# Altium PCB CT310高端控制盒核心板电路V1.3.PcbDoc (part 2 of 10)
Units mil, origin at the board's own origin, x right, y up, seen from the top; angles counter-clockwise.
Board outline 3735.76 x 4625 mil, 2 copper layers (TOP, BOTTOM), stack 10.4 mil thick; 198 components, 362 nets, 1085 pads, 352 vias.
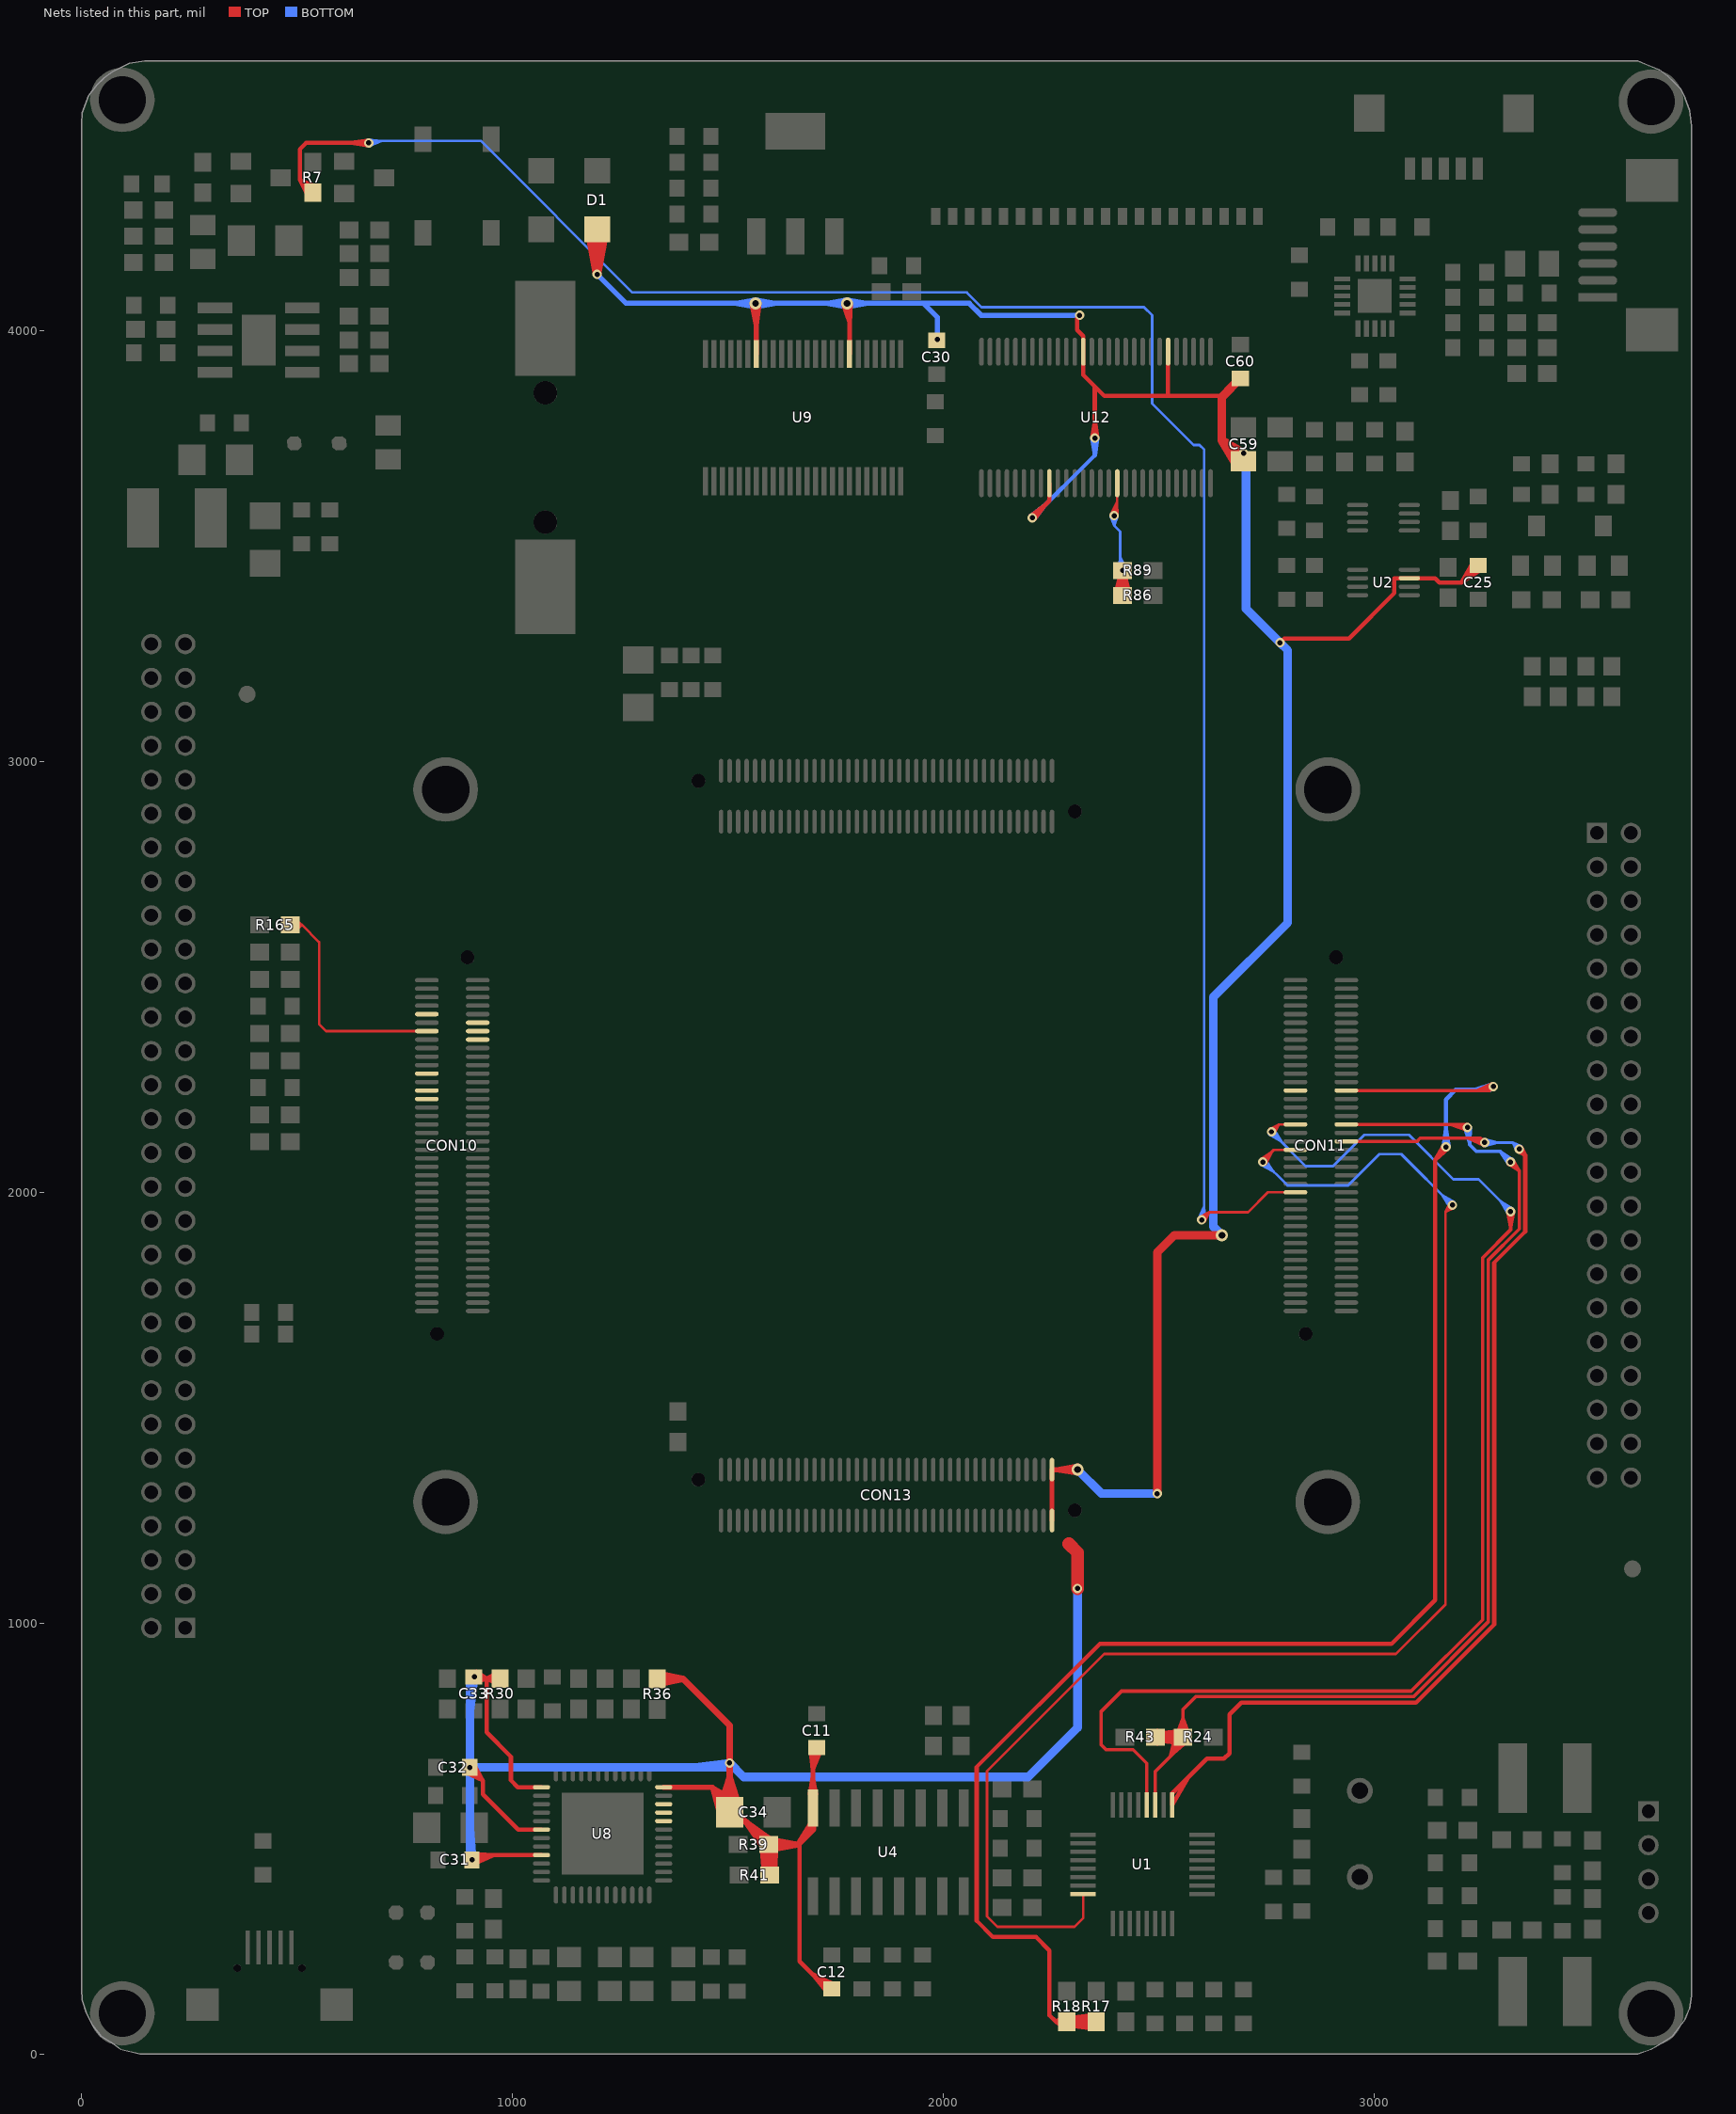
[diagram p2: the nets of this part, all layers, seen from the top]

## Via types
v1: diameter 22, hole 12, TOP to BOTTOM, tented both sides, 177 vias
v2: diameter 22, hole 12, TOP to BOTTOM, 89 vias
v3: diameter 28, hole 16, TOP to BOTTOM, 37 vias
v4: diameter 30, hole 20, TOP to BOTTOM, tented both sides, 26 vias
v5: diameter 24, hole 12, TOP to BOTTOM, 17 vias
v6: diameter 50, hole 30, TOP to BOTTOM, tented both sides, 5 vias
v7: diameter 40, hole 24, TOP to BOTTOM, 1 vias

## Nets (pads, with @x,y where several pads share a name; then routed paths per layer and width w, separated by ;. In a path a pad name is that pad's centre, name@x,y a point inside that pad or via, vN(x,y) a via of type N, cw(c..) or ccw(c..) an arc to the next point about the centre after c; other vN are vias at no path point) (continued)
CAM_D6: CON11.36 U1.12 | length 3365.9
  TOP w6: v2@2756.12,2146.51 2777.86,2157.1 ; v2(2760.76,2140) 2777.86,2157.1 ; v2@2767.27,2135.36 2777.86,2157.1 ; CON11.36@2793.9,2157.1 2777.86,2157.1 ; CON11.36@2816.4,2157.1 2777.86,2157.1
  TOP w8: U1.12@2471.41,577.79 2471.41,674.35 2439.76,706 2376.76,706 2365.76,717 2365.76,795 2412.76,842 3085.08,842 3250.65,1007.57 3250.65,1847.57 3315.76,1912.68 v1(3315.76,1955) 3315.76,1920 ; U1.12@2471.41,602.4 2471.41,631.32 ; v1@3308.8,1954.3 3315.76,1920 ; v1@3322.72,1954.3 3315.76,1920
  BOTTOM w6: v2@2755.82,2133.71 2784.49,2116.27 v2@2767.05,2144.94 ; v2(2760.76,2140) 2840.19,2060.57 2903.61,2060.57 2976.04,2133 3079.78,2133 3182.78,2030 3241.32,2030 3315.76,1955.56 v1(3315.76,1955) 3292.35,1978.97 ; v1@3309.41,1950.13 3292.35,1978.97 ; v1@3320.77,1961.23 3292.35,1978.97
CAM_D7: CON11.35 R24.1 R43.1 U1.11 | length 5095.2
  TOP w6: v1@3208.66,2157.1 v1(3215.76,2150)
  TOP w8: U1.11@2491.09,577.79 2491.09,655.33 R24.1@2553,717.24 ; U1.11@2491.09,602.4 2491.09,631.32 ; R43.1@2491.19,735 R24.1@2555.33,735 ; R43.1@2493.16,735 R24.1@2536.85,735 ; R43.1@2493.84,727.34 R24.1@2536.85,735 ; R43.1@2493.84,742.66 R24.1@2536.85,735 ; R43.1@2495.98,719.57 R24.1@2536.85,735 ; R43.1@2495.98,750.43 R24.1@2536.85,735 ; R24.1@2538.88,741.03 2526.36,690.6 ; R24.1@2539.9,737.82 2555.33,778.69 ; R24.1@2546.51,738.5 2526.36,690.6 ; R24.1@2547.18,720.58 R43.1@2508.35,745.76 ; R24.1@2547.18,749.42 R43.1@2508.35,724.24 ; R24.1@2547.67,735.68 2555.33,778.69 ; R24.1@2548.9,719.96 R43.1@2509.12,739.94 ; R24.1@2548.9,750.04 R43.1@2509.12,730.06 ; R24.1@2550.96,727.7 R43.1@2508.35,745.76 ; R24.1@2550.96,742.3 R43.1@2508.35,724.24 ; R24.1@2551.85,727.46 R43.1@2509.12,739.94 ; R24.1@2551.85,742.54 R43.1@2509.12,730.06 ; R24.1@2552.32,719.35 R43.1@2509.12,730.06 ; R24.1@2552.32,750.65 R43.1@2509.12,739.94 ; R24.1@2553,717.68 R24.1@2553,717.24 ; R24.1@2553.55,727.32 R43.1@2509.12,730.06 ; R24.1@2553.55,742.68 R43.1@2509.12,739.94 ; R24.1@2554.37,719.35 R43.1@2508.35,724.24 ; R24.1@2554.37,750.65 R43.1@2508.35,745.76 ; R24.1@2554.52,727.4 R43.1@2508.35,724.24 ; R24.1@2554.52,742.6 R43.1@2508.35,745.76 ; R24.1@2559.61,730.53 2526.36,690.6 ; R24.1@2562.98,735.68 2555.33,778.69 ; R24.1@2565.38,724.92 2526.36,690.6 ; R24.1@2570.76,737.82 2555.33,778.69 ; CON11.35@2934.52,2157.1 v1@3208.66,2157.1 ; CON11.35@2957.02,2157.1 2986.02,2157.1 ; v1@3213.9,2143.25 3176.8,2157.1 ; v1(3215.76,2150) 3176.8,2157.1 ; v1@3216.4,2156.97 3176.8,2157.1 ; v1@3311.46,2064.48 3335.76,2050 ; v1(3315.76,2070) 3335.76,2050 ; v1@3321.28,2074.3 3335.76,2050 ; R43.1@2508.35,724.24 R24.1@2553.36,735 ; R43.1@2508.35,745.76 R24.1@2553.36,735 ; R43.1@2509.12,730.06 R24.1@2553.36,735 ; R43.1@2509.12,739.94 R24.1@2553.36,735 ; R43.1@2509.67,735 R24.1@2553.36,735 ; R43.1@2509.67,735 2552.68,742.66 R43.1@2509.67,735 ; R43.1@2509.67,735 2552.68,727.34 R43.1@2509.67,735 ; R43.1@2509.67,735 2550.54,750.43 R43.1@2509.67,735 ; R43.1@2509.67,735 2550.54,719.57 R43.1@2509.67,735 ; R43.1@2509.67,735 R24.1@2553.36,735 ; 2526.36,690.6 R24.1@2553.36,735 ; R24.1@2553,717.24 2555.33,719.57 R24.1@2555.33,735 ; R24.1@2555.33,735 2555.33,799.57 2584.76,829 3090.46,829 3263.65,1002.19 3263.65,1842.19 3335.76,1914.3 3335.76,2050
  BOTTOM w8: v1@3208.95,2148.37 3220.76,2113.99 ; v1@3222.75,2150.29 3220.76,2113.99 ; v1@3310.34,2065.56 3290.76,2095 ; v1@3320.2,2075.42 3290.76,2095 ; 3220.76,2113.99 v1(3215.76,2150) 3220.76,2145 3220.76,2110 3235.76,2095 3290.76,2095 ; 3290.76,2095 v1(3315.76,2070) 3290.76,2095
CAM_HREF: CON11.27 R17.2 R18.2 | length 4764.5
  TOP w6: 3266.6,2235.84 v1(3275.76,2245)
  TOP w8: CON11.27@2934.52,2235.84 3266.6,2235.84 ; CON11.27@2957.02,2235.84 2986.02,2235.84 ; v1@3273.52,2251.63 3237.63,2235.84 ; v1(3275.76,2245) 3237.63,2235.84 ; v1@3276.78,2238.07 3237.63,2235.84
  TOP w10: R18.2@2281.45,60.53 2260.76,74.57 ; R18.2@2281.45,88.6 2260.76,74.57 ; R18.2@2287.93,60.04 2335.45,74.57 R18.2@2287.93,89.09 ; R17.2@2349.8,62.49 R18.2@2302.51,84.64 ; R17.2@2349.8,86.64 R18.2@2302.51,64.5 ; R17.2@2351.92,60.04 2304.41,74.57 R17.2@2351.92,89.09 ; R17.2@2354.09,72.6 R18.2@2302.51,64.5 ; R17.2@2354.09,74.57 R18.2@2285.76,74.57 2260.76,74.57 ; R17.2@2354.09,76.54 R18.2@2302.51,84.64 ; R17.2@2354.31,57.92 R18.2@2302.51,64.5 ; R17.2@2354.31,91.22 R18.2@2302.51,84.64 ; v1@3160.87,2108.48 3140.65,2074.89 ; v1@3170.06,2100.82 3140.65,2074.89 ; 2260.76,74.57 2245.76,89.57 2245.76,240 2214.76,271 2114.76,271 2076.76,309 2076.76,666 2362.76,952 3039.52,952 3140.65,1053.14 3140.65,2074.89 ; 3140.65,2074.89 v1(3165.76,2105) 3165.76,2100 3140.65,2074.89
  BOTTOM w10: v1@3159.78,2105.44 3165.76,2146 ; v1@3165.76,2100 3165.76,2215 3187.93,2237.17 v1@3268.59,2237.17 ; v1(3165.76,2105) 3165.76,2146 ; v1@3171.74,2105.44 3165.76,2146 ; v1@3274.35,2250.83 3230.74,2237.17 ; v1(3275.76,2245) 3230.74,2237.17 ; v1@3276.4,2239.03 3230.74,2237.17
CAM_MCLK: CON11.28
CAM_PCLK: CON11.39 U1.9 | length 2924.7
  TOP w8: CON11.39@2934.52,2117.73 3098.49,2117.73 3105.76,2125 3245.76,2125 v1(3255.76,2115) 3217.38,2125 ; CON11.39@2957.02,2117.73 2986.02,2117.73 ; v1@3253.4,2108.41 3217.38,2125 ; v1@3256.92,2121.9 3217.38,2125
  TOP w10: 2566.47,640.71 U1.9@2530.46,577.79 2530.46,604.7 2610.76,685 2650.76,685 2663.26,697.5 2663.26,787.5 2690.76,815 3096.26,815 3277.65,996.39 3277.65,1836.39 3349.76,1908.5 3349.76,2086 ; v1@3332.21,2095.16 3349.76,2086 ; v1(3335.76,2100) 3349.76,2086 ; v1@3340.6,2103.55 3349.76,2086
  BOTTOM w6: v1(3255.76,2115) 3320.76,2115 ; v1@3256.86,2107.08 3284.76,2115 v1@3256.86,2122.92 ; v1@3329.14,2095.51 3320.76,2115 ; v1@3340.25,2106.62 3320.76,2115 ; 3320.76,2115 v1(3335.76,2100) 3320.76,2115
CAM_VSYNC: CON11.42 U1.24 | length 3839.9
  TOP w6: 2323.83,348.18 U1.24@2323.77,371.1 2323.83,371.04 2323.83,315 2303.83,295 2124.7,295 2100.76,318.94 2100.76,656.06 2372.7,928 3049.46,928 3164.65,1043.2 3164.65,1953.89 ; v2@2735.47,2076 2762.63,2094.59 ; v2@2747.34,2065.45 2762.63,2094.59 ; 2770.9,2098.06 CON11.42@2793.9,2098.06 ; CON11.42@2816.4,2098.06 2766.1,2098.06 2740.76,2072.72 v2(2740.76,2070) 2762.63,2094.59 ; v1@3174.2,1974.58 3164.65,1953.89 ; v1@3185.34,1963.44 3164.65,1953.89 ; 3164.65,1953.89 v1(3180.76,1970) 3164.65,1953.89
  BOTTOM w6: v2@2736.19,2063.43 2765.63,2047.84 ; v2@2746.76,2075.29 2765.63,2047.84 ; v1@3174.53,1964.98 3156.75,1993.4 ; v1@3185.62,1976.35 3156.75,1993.4 ; 2765.63,2047.84 v2(2740.76,2070) 2740.76,2072.72 2797.91,2015.57 2938.61,2015.57 3011.11,2088.07 3062.08,2088.07 3180.15,1970 v1(3180.76,1970) 3156.75,1993.4
CHG_COK: CON10.66
CHG_DOK: CON10.67 R165.1 | length 726.2
  TOP w6: R165.1@484.05,2620 510.76,2620 ; R165.1@486.02,2620 510.76,2620 ; R165.1@486.46,2615.34 510.76,2620 ; R165.1@486.46,2624.66 510.76,2620 ; R165.1@488.32,2609.57 510.76,2620 ; R165.1@488.32,2630.43 510.76,2620 ; R165.1@491.64,2604.29 510.76,2620 ; R165.1@491.64,2635.71 510.76,2620 ; 755.16,2373.64 CON10.67@778.16,2373.64 ; CON10.67@800.66,2373.64 567.12,2373.64 550.76,2390 550.76,2580 510.76,2620
CHG_EN: CON11.52 R7.2 | length 5141.4
  TOP w6: v2@2593.92,1942.05 2616.61,1953.57 ; v2(2598.61,1935.57) 2616.61,1953.57 ; v2@2605.09,1930.87 2616.61,1953.57 ; 2770.9,1999.62 CON11.52@2793.9,1999.62 ; CON11.52@2816.4,1999.62 2752.66,1999.62 2706.61,1953.57 2616.61,1953.57
  TOP w10: R7.2@523.98,4312.77 505.76,4349.57 ; R7.2@535.76,4319.57 505.76,4349.57 ; R7.2@535.76,4321.54 505.76,4349.57 ; R7.2@543.71,4333.89 505.76,4349.57 ; v1@665.32,4429.02 624.76,4435 v1@665.32,4440.98 ; v1(665.76,4435) 520.76,4435 505.76,4420 505.76,4349.57
  BOTTOM w6: v1@665.5,4443 696.44,4440 ; v1@668.05,4427.34 696.44,4440 ; v2@2591,1938.04 2604.76,1967.52 ; v2@2606.6,1935.04 2604.76,1967.52 ; 696.44,4440 v1(665.76,4435) 670.76,4440 925.76,4440 1277.76,4088 2053.82,4088 2087.82,4054 2464.89,4054 2483.89,4035 2483.89,3830 2579.89,3734 2593.63,3734 2604.76,3722.87 2604.76,1941.72 v2(2598.61,1935.57) 2604.76,1967.52
CHG_FLT: CON10.68
CHG_UOK: CON10.71
CLK_SEL: R86.2 R89.1 U12.17 | length 3896.9
  TOP w6: v1@2388.21,3572.64 2402.83,3602.27 ; R86.2@2396.68,3385.49 R89.1@2406.16,3424.31 ; R86.2@2396.81,3387.15 R89.1@2409.95,3423.57 ; R86.2@2397.06,3388.57 2413.11,3422.89 ; R86.2@2399.06,3388.69 2415.33,3422.69 ; R89.1@2399.06,3439.16 2415.33,3405.17 ; R86.2@2401.04,3388.78 2417.54,3422.89 ; R86.2@2401.38,3390.02 R89.1@2420.71,3423.57 ; R86.2@2401.87,3391.36 R89.1@2424.49,3424.31 ; R86.2@2402.69,3384.5 R89.1@2406.16,3424.31 ; R86.2@2402.69,3385.54 R89.1@2409.95,3423.57 ; R86.2@2402.77,3386.44 2413.11,3422.89 ; 2402.83,3594.92 U12.17@2402.83,3618.23 ; U12.17@2402.83,3645.4 2402.83,3577.07 v1(2395.76,3570) 2402.83,3602.27 ; v1@2403.72,3569.25 2402.83,3602.27 ; R86.2@2404.75,3386.51 2415.33,3422.69 ; R89.1@2404.75,3441.34 2415.33,3405.17 ; R86.2@2406.73,3386.58 2417.54,3422.89 ; R86.2@2406.88,3387.4 R89.1@2420.71,3423.57 ; R86.2@2407.14,3388.31 R89.1@2424.49,3424.31 ; R89.1@2407.37,3442.04 2414.33,3413.11 ; R89.1@2407.35,3442.25 2413.79,3410.43 ; R89.1@2407.4,3441.75 2415.33,3413.85 R89.1@2423.25,3441.75 ; R86.2@2408.68,3384.87 R89.1@2409.95,3423.57 ; R86.2@2408.68,3385.26 2413.11,3422.89 ; R86.2@2408.71,3384.43 R89.1@2406.16,3424.31 ; R86.2@2410.65,3385.29 2415.33,3422.69 ; R89.1@2410.65,3442.56 2415.33,3405.17 ; R86.2@2412.62,3385.32 2417.54,3422.89 ; R86.2@2412.66,3385.69 R89.1@2420.71,3423.57 ; R86.2@2412.74,3386.11 R89.1@2424.49,3424.31 ; R86.2@2417.91,3386.11 R89.1@2406.16,3424.31 ; R86.2@2418.03,3385.32 2413.11,3422.89 ; R86.2@2417.99,3385.69 R89.1@2409.95,3423.57 ; R86.2@2420,3385.29 2415.33,3422.69 ; R89.1@2420,3442.56 2415.33,3405.17 ; R86.2@2421.95,3384.43 R89.1@2424.49,3424.31 ; R86.2@2421.98,3384.87 R89.1@2420.71,3423.57 ; R86.2@2421.97,3385.26 2417.54,3422.89 ; R89.1@2423.29,3442.04 2416.32,3413.11 ; R89.1@2423.3,3442.25 2416.86,3410.43 ; R86.2@2423.52,3388.31 R89.1@2406.16,3424.31 ; R86.2@2423.77,3387.4 R89.1@2409.95,3423.57 ; R86.2@2423.93,3386.58 2413.11,3422.89 ; R86.2@2425.9,3386.51 2415.33,3422.69 ; R89.1@2425.9,3441.34 2415.33,3405.17 ; R86.2@2427.88,3386.44 2417.54,3422.89 ; R86.2@2427.97,3384.5 R89.1@2424.49,3424.31 ; R86.2@2427.97,3385.54 R89.1@2420.71,3423.57 ; R86.2@2428.78,3391.36 R89.1@2406.16,3424.31 ; R86.2@2429.27,3390.02 R89.1@2409.95,3423.57 ; R86.2@2429.61,3388.78 2413.11,3422.89 ; R86.2@2431.6,3388.69 2415.33,3422.69 ; R89.1@2431.6,3439.16 2415.33,3405.17 ; R86.2@2433.59,3388.57 2417.54,3422.89 ; R86.2@2433.84,3387.15 R89.1@2420.71,3423.57 ; R86.2@2433.97,3385.49 R89.1@2424.49,3424.31 ; R86.2@2400.14,3391.9 2415.33,3405.17 ; R86.2@2400.14,3391.9 2415.33,3405.17 ; R86.2@2400.14,3391.9 2415.33,3405.17 ; R86.2@2400.14,3391.9 2415.33,3405.17 ; R86.2@2400.14,3391.9 2415.33,3405.17 ; R86.2@2400.14,3391.9 2415.33,3405.17 ; R86.2@2405.02,3387.83 2415.33,3405.17 ; R86.2@2405.02,3387.83 2415.33,3405.17 ; R86.2@2405.02,3387.83 2415.33,3405.17 ; R86.2@2405.02,3387.83 2415.33,3405.17 ; R86.2@2405.02,3387.83 2415.33,3405.17 ; R86.2@2405.02,3387.83 2415.33,3405.17 ; R89.1@2406.16,3424.31 R86.2@2413.36,3385 ; R89.1@2409.95,3423.57 R86.2@2413.36,3385 ; R86.2@2410.67,3385.54 2415.33,3405.17 ; R86.2@2410.67,3385.54 2415.33,3405.17 ; R86.2@2410.67,3385.54 2415.33,3405.17 ; R86.2@2410.67,3385.54 2415.33,3405.17 ; R86.2@2410.67,3385.54 2415.33,3405.17 ; R86.2@2410.67,3385.54 2415.33,3405.17 ; 2413.11,3422.89 R86.2@2413.36,3385 ; 2413.79,3410.43 v1(2415.33,3442.85) ; 2413.79,3410.43 2423.21,3441.49 2414.33,3413.11 ; 2414.33,3413.11 v1(2415.33,3442.85) ; R86.2@2415.33,3385 2415.33,3405.17 ; R86.2@2415.33,3385 2415.33,3405.17 ; R86.2@2415.33,3385 2415.33,3405.17 ; R86.2@2415.33,3385 2415.33,3405.17 ; R86.2@2415.33,3385 2415.33,3405.17 ; R86.2@2415.33,3385 2415.33,3405.17 ; R86.2@2415.33,3385 v1(2415.33,3442.85) ; 2415.33,3405.17 R86.2@2419.98,3385.54 ; 2415.33,3405.17 R86.2@2425.63,3387.83 ; 2415.33,3405.17 R86.2@2430.52,3391.9 ; 2415.33,3405.17 R86.2@2419.98,3385.54 ; 2415.33,3405.17 R86.2@2425.63,3387.83 ; 2415.33,3405.17 R86.2@2430.52,3391.9 ; 2415.33,3405.17 R86.2@2419.98,3385.54 ; 2415.33,3405.17 R86.2@2425.63,3387.83 ; 2415.33,3405.17 R86.2@2430.52,3391.9 ; 2415.33,3405.17 R86.2@2419.98,3385.54 ; 2415.33,3405.17 R86.2@2425.63,3387.83 ; 2415.33,3405.17 R86.2@2430.52,3391.9 ; 2415.33,3405.17 R86.2@2419.98,3385.54 ; 2415.33,3405.17 R86.2@2425.63,3387.83 ; 2415.33,3405.17 R86.2@2430.52,3391.9 ; 2415.33,3405.17 R86.2@2419.98,3385.54 ; 2415.33,3405.17 R86.2@2425.63,3387.83 ; 2415.33,3405.17 R86.2@2430.52,3391.9 ; v1(2415.33,3442.85) 2416.32,3413.11 ; v1(2415.33,3442.85) 2416.86,3410.43 ; 2416.32,3413.11 2407.44,3441.52 2416.86,3410.43 ; R86.2@2417.3,3385 2417.54,3422.89 ; R86.2@2417.3,3385 R89.1@2420.71,3423.57 ; R86.2@2417.3,3385 R89.1@2424.49,3424.31
  BOTTOM w6: v1@2387.88,3568.62 2395.76,3546.87 ; v1(2395.76,3570) 2395.76,3546.87 ; v1@2403.64,3568.62 2395.76,3546.87 ; v1@2407.34,3442.45 2409.76,3473.73 ; v1@2422.95,3445.27 2409.76,3473.73 ; 2395.76,3546.87 2409.76,3532.87 2409.76,3448.42 v1(2415.33,3442.85) 2409.76,3473.73
COMPASS_RDY: CON10.57
DC33_EN: CON10.70
DC33V: C11.1 C12.1 C25.1 C30.1 C31.1 C32.1 C33.1 C34.1 C59.1 C60.1 CON13.1 CON13.2 D1.1 R30.2 R36.1 R39.1 R41.1 U2.7 U4.16 U8.24 U8.37 U8.42 U8.45 U9.7 U9.18 U12.9 U12.34 U12.44 | length 18729.4
  TOP w10: C32.1@895.13,667.08 C32.1@892.95,652.54 ; C31.1@899.8,450.66 C31.1@904.37,464.66 ; C31.1@899.97,451.58 C31.1@905.76,461.36 ; C32.1@900.13,663.03 930.76,634.37 ; C32.1@900.44,664.69 930.76,634.37 ; C31.1@904.68,455.9 951.02,461.36 ; C31.1@904.77,455.92 955.62,461.36 ; C31.1@904.8,455.92 946.07,459.58 ; C31.1@905,455.95 949.71,458.64 ; C31.1@905.13,451.97 955.62,461.36 ; C32.1@905.09,660.84 C32.1@892.95,652.54 ; C33.1@905.18,872.79 C33.1@912.58,862.27 ; C33.1@905.99,878.64 C33.1@916.01,886.82 ; C31.1@907.31,444.2 949.71,458.64 ; C31.1@907.43,444.24 955.62,461.36 ; C31.1@907.57,444.28 946.07,459.58 ; C31.1@907.59,444.29 951.02,461.36 ; C31.1@908.99,439.85 955.62,461.36 ; C32.1@910.13,670.89 930.76,634.37 ; C33.1@911.48,874.94 939.61,871 ; C31.1@911.49,451.77 C31.1@904.37,464.66 ; C31.1@911.55,451.58 C31.1@905.76,461.36 ; C33.1@913.44,871 939.61,871 ; C33.1@916.66,873.9 C33.1@916.01,886.82 ; C33.1@916.73,874.44 C33.1@912.58,862.27 ; R30.2@966.9,856.74 939.61,871 ; R30.2@966.9,885.27 939.61,871 ; R30.2@970.4,871 939.61,871 ; 1016.88,461.36 U8.45@1051.88,461.36 ; 1016.88,520.41 U8.42@1051.88,520.41 ; 1016.88,618.84 U8.37@1051.88,618.84 ; U8.45@1066.88,461.36 C31.1@905.76,461.36 ; U8.42@1066.88,520.41 1012.59,520.41 930.76,602.24 930.76,634.37 ; U8.37@1066.88,618.84 1011.92,618.84 995.76,635 995.76,690 939.61,746.15 939.61,871 ; 1665.76,490 1665.76,215 1730.13,150.63 C12.1@1740.76,150.63 ; U4.16@1689.93,602.72 1696.72,643.98 ; C11.1@1691.08,710.81 1696.72,659.86 ; U4.16@1696.72,570.67 1696.72,701.59 C11.1@1705.76,710.63 ; U4.16@1696.72,602.17 1696.72,643.98 ; U4.16@1703.51,602.72 1696.72,643.98 ; C11.1@1703.79,710.63 1696.72,659.86 ; C11.1@1716.07,707.33 1696.72,659.86 ; C12.1@1729.76,141.68 1695.36,185.4 ; C12.1@1738.79,150.63 1695.36,185.4 ; C12.1@1745.55,161.4 1695.36,185.4 ; v3@1767,4060.58 1781.89,4016.97 ; U9.7@1781.89,3945.28 1781.89,4056.52 v3(1775.76,4062.64) 1781.89,4016.97 ; U9.7@1781.89,3971.78 1781.89,4007.78 ; v3@1784.75,4062.96 1781.89,4016.97 ; v1@2201.81,3569.51 2237.97,3597.21 v1@2210.27,3561.05 ; v1(2205.76,3565) 2245.35,3604.59 ; U12.9@2245.35,3618.23 2245.35,3604.59 ; U12.9@2245.35,3645.4 2245.35,3604.59 ; CON13.1@2251.45,1237.81 CON13.2@2251.45,1355.93 ; CON13.1@2251.45,1260.31 2251.45,1295.31 ; 2251.45,1298.43 CON13.2@2251.45,1333.43 ; v1(2315.76,4035) 2309.76,4029 2309.76,4001.3 2324.09,3986.98 ; U12.44@2324.09,3923.35 2324.09,3896.67 ; v1@2344.78,3750.44 2350.76,3791 v1@2356.74,3750.44 ; v1(2350.76,3750) 2350.76,3870 ; 2520.94,3888.04 U12.34@2520.94,3923.35 ; U12.34@2520.94,3950.52 2520.94,3847.64 ; 2647.98,3847.64 2520.94,3847.64 ; v1(2780.76,3275) 2790.76,3285 2940.76,3285 3045.92,3390.16 3045.92,3424.84 ; U2.7@3061.11,3424.84 3045.92,3424.84 ; U2.7@3100.48,3424.84 3135.41,3424.84 ; C25.1@3228.6,3461.97 3201.83,3415.44 ; C25.1@3238.79,3454.37 3201.83,3415.44 ; C25.1@3240.76,3454.37 3201.39,3415 3150.71,3415 3140.87,3424.84 U2.7@3080.8,3424.84 3045.92,3424.84 ; C25.1@3246.91,3444.58 3201.83,3415.44 ; C32.1@892.95,652.54 v1(900.76,665) ; C32.1@892.95,652.54 930.76,634.37 ; C32.1@896.78,660.51 930.76,634.37 ; C32.1@896.78,660.51 930.76,634.37 ; C32.1@896.78,660.51 930.76,634.37 ; C32.1@896.78,660.51 930.76,634.37 ; v1(900.76,665) 930.76,634.37 ; v1(900.76,665) 930.76,634.37 ; v1(900.76,665) 930.76,634.37 ; v1(900.76,665) 930.76,634.37 ; C31.1@904.37,464.66 v1(905.76,450) ; C31.1@904.37,464.66 955.62,461.36 ; C32.1@905.33,668.89 930.76,634.37 ; C32.1@905.33,668.89 930.76,634.37 ; C32.1@905.33,668.89 930.76,634.37 ; C32.1@905.33,668.89 930.76,634.37 ; v1(905.76,450) C31.1@905.76,461.36 ; v1(905.76,450) 951.02,461.36 ; v1(905.76,450) 949.71,458.64 ; v1(905.76,450) 946.07,459.58 ; v1(905.76,450) 955.62,461.36 ; C33.1@910.55,869 939.61,871 ; C33.1@910.55,869 939.61,871 ; C33.1@910.55,869 939.61,871 ; C33.1@910.55,869 939.61,871 ; v1(910.76,875) 939.61,871 ; v1(910.76,875) C33.1@912.58,862.27 ; v1(910.76,875) 939.61,871 ; v1(910.76,875) C33.1@916.01,886.82 ; v1(910.76,875) 939.61,871 ; v1(910.76,875) 939.61,871 ; C33.1@912.19,880.83 939.61,871 ; C33.1@912.19,880.83 939.61,871 ; C33.1@912.19,880.83 939.61,871 ; C33.1@912.19,880.83 939.61,871 ; C33.1@912.58,862.27 939.61,871 ; C33.1@916.01,886.82 939.61,871 ; 2324.09,3896.67 U12.44@2324.09,3950.52 2324.09,3986.98 ; 2324.09,3896.67 2350.76,3870 ; 2324.09,3986.98 2324.09,3977.68 2324.09,3986.98 ; 2350.76,3870 2373.12,3847.64 2520.94,3847.64
  TOP w12: U8.24@1350.35,618.84 1463.35,618.84 ; U8.24@1365.35,618.84 1406.35,618.84 ; C34.1@1480.5,553.5 1463.35,618.84 ; C34.1@1491.9,557.61 1463.35,618.84 ; C34.1@1503.5,564.51 1463.35,618.84 ; C34.1@1503.5,578.69 1463.35,618.84 ; C34.1@1513.49,573.57 1463.35,618.84 ; C34.1@1520.77,583.26 1463.35,618.84 ; v3@1555.67,4061.73 1565.34,4012.55 ; U9.18@1565.34,3945.28 1565.34,4060.91 v3(1563.61,4062.64) 1565.34,4012.55 ; U9.18@1565.34,3971.78 1565.34,4013.78 ; v3@1571.61,4062.28 1565.34,4012.55 ; CON13.2@2251.45,1355.93 v3(2310.97,1355.93) 2260.97,1355.93 ; v3@2310.33,1347.95 2260.97,1355.93 ; v3@2310.33,1363.9 2260.97,1355.93
  TOP w15: R36.1@1335.76,870.43 1395.33,870.43 ; R36.1@1337.01,858.31 1395.33,870.43 ; R36.1@1337.01,882.55 1395.33,870.43 ; C34.1@1479.8,568.27 1503.5,641 ; C34.1@1494.52,565.04 1503.5,641 ; C34.1@1503.5,560.57 1503.5,578.69 v1(1503.5,675) 1503.5,762.26 1395.33,870.43 ; C34.1@1503.5,564.51 1503.5,641 ; C34.1@1512.48,565.04 1503.5,641 ; C34.1@1519.05,560.57 R39.1@1594.05,485.57 ; C34.1@1527.19,568.27 1503.5,641 ; R39.1@1579.89,485.76 R41.1@1585,421.07 ; R39.1@1581.96,484.02 R41.1@1596.19,420.82 ; R39.1@1582.61,477.9 1542.54,537.08 ; R41.1@1584.06,416.15 1596.19,479.69 R41.1@1608.32,416.15 ; R39.1@1584.27,482.34 R41.1@1607.24,421.8 ; R41.1@1596.19,415 1596.19,483.42 R39.1@1594.05,485.57 ; R39.1@1597.16,473.44 1660.7,485.57 ; R39.1@1597.16,497.7 1660.7,485.57 ; R39.1@1600.11,494.74 1542.54,537.08 ; R39.1@1604.01,483.11 R41.1@1585,421.07 ; R39.1@1606.21,484.83 R41.1@1596.19,420.82 ; R39.1@1608.16,486.55 R41.1@1607.24,421.8 ; U4.16@1696.72,570.67 1696.72,520.96 ; 1542.54,537.08 1592.08,485.57 R41.1@1585,421.07 ; R39.1@1594.05,485.57 R41.1@1596.19,420.82 ; R39.1@1594.05,485.57 1661.33,485.57 1665.76,490 ; R41.1@1607.24,421.8 1596.02,485.57 1660.7,485.57 ; 1665.76,490 U4.16@1696.72,539.18 ; 1665.76,490 1696.72,520.96 ; 1696.72,520.96 U4.16@1696.72,539.18 ; 1696.72,520.96 U4.16@1696.72,539.18
  TOP w20: D1.1@1175.88,4232.29 1195.76,4144.51 ; 1182.98,4200.96 v1(1195.76,4130) ; 1208.54,4200.96 v1(1195.76,4130) ; D1.1@1215.64,4232.29 1195.76,4144.51 ; v1(2495.76,1300) 2495.76,1860 2535.76,1900 v3(2645.76,1900) ; C59.1@2678.88,3688.47 2645.76,3745 ; C60.1@2686.65,3888.27 2647.98,3847.64 ; C60.1@2688.61,3888.27 2647.98,3847.64 ; C59.1@2698.92,3706.7 2645.76,3745 ; v1(1195.76,4130) 1195.76,4144.51 ; v1(1195.76,4130) 1195.76,4144.51 ; v1(1195.76,4130) D1.1@1195.76,4234.51 1195.76,4144.51 ; 2645.76,3745 v1(2695.76,3715) ; 2645.76,3745 v1(2695.76,3715) ; 2645.76,3745 v1(2695.76,3715) ; 2645.76,3745 2689.85,3696.54 v1(2695.76,3715) ; 2645.76,3745 2645.76,3845.42 2647.98,3847.64 ; 2645.76,3745 2694.22,3696.54 v1(2695.76,3715)
  TOP w30: 2290.61,1183.57 2310.76,1163.42 v1(2310.76,1080)
  BOTTOM w10: v1@2201.81,3569.51 2237.97,3597.21 v1@2210.27,3561.05 ; v1(2205.76,3565) 2350.76,3710 ; v1@2344.78,3749.55 2350.76,3710 ; v1(2350.76,3750) 2350.76,3710 ; v1@2356.74,3749.55 2350.76,3710
  BOTTOM w12: v1(1195.76,4130) 1263.12,4062.64 v3(1563.61,4062.64) v3(1775.76,4062.64) 1953.12,4062.64 ; v3@1562.97,4054.67 1513.61,4062.64 v3@1562.97,4070.62 ; v3@1564.25,4054.67 1613.61,4062.64 v3@1564.25,4070.62 ; v3@1775.12,4054.67 1725.76,4062.64 v3@1775.12,4070.62 ; v3@1776.4,4054.67 1825.76,4062.64 v3@1776.4,4070.62 ; v1(1985.76,3979.02) 1985.76,4030 1953.12,4062.64 ; v1(2315.76,4035) 2087.02,4035 2059.38,4062.64 1953.12,4062.64
  BOTTOM w20: 900.76,522.65 v1(905.76,450) 900.76,455 v1(900.76,665) ; 900.76,795.47 v1(910.76,875) 900.76,865 v1(900.76,665) ; 1423.63,665 v1(1503.5,675) ; v1(2310.76,1080) 2310.76,757.43 2195.83,642.5 1536,642.5 v1(1503.5,675) ; v3(2310.97,1355.93) 2366.33,1300.57 v1@2495.76,1300.57 ; 2424.75,1300.57 v1(2495.76,1300) ; v1(2695.76,3715) 2701.67,3709.09 2701.67,3354.09 v1(2780.76,3275) ; 2727.33,3328.43 v1(2780.76,3275) ; v1(900.76,665) 1493.5,665 v1(1503.5,675) ; 2625.76,1920 v3(2645.76,1900) 2625.76,1920 ; 2625.76,1920 2625.76,2452.72 2798.61,2625.57 2798.61,3257.15 v1(2780.76,3275)
EECK: U8.21
EECS: U8.22
EEDIO: U8.20
GM_INT1: CON10.51
GM_INT2: CON10.53

## Text inside footprints (layer, text, board x,y; h text height)
CON12: PIN_NUMBER "75" at 1503.1,2759.86 h25 r180; PIN_NUMBER "76" at 1503.1,3077.98 h25 r180; PIN_NUMBER "69" at 1562.16,2759.86 h25 r180; PIN_NUMBER "11" at 2133.02,2759.86 h25 r180; PIN_NUMBER "13" at 2113.34,2759.86 h25 r180; PIN_NUMBER "71" at 1542.47,2759.86 h25 r180; PIN_NUMBER "73" at 1522.79,2759.86 h25 r180; PIN_NUMBER "64" at 1621.21,3077.98 h25 r180; PIN_NUMBER "65" at 1601.53,2759.86 h25 r180; PIN_NUMBER "62" at 1640.9,3077.98 h25 r180; PIN_NUMBER "58" at 1680.27,3077.98 h25 r180; PIN_NUMBER "60" at 1660.58,3077.98 h25 r180; PIN_NUMBER "63" at 1621.21,2759.86 h25 r180; PIN_NUMBER "39" at 1857.43,2759.86 h25 r180; PIN_NUMBER "38" at 1877.12,3077.98 h25 r180; PIN_NUMBER "48" at 1778.69,3077.98 h25 r180; PIN_NUMBER "3" at 2221.76,2759.86 h25 r180; PIN_NUMBER "1" at 2241.45,2759.86 h25 r180; PIN_NUMBER "5" at 2202.08,2759.86 h25 r180; PIN_NUMBER "19" at 2054.28,2759.86 h25 r180; PIN_NUMBER "66" at 1601.53,3077.98 h25 r180; PIN_NUMBER "21" at 2034.6,2759.86 h25 r180; PIN_NUMBER "20" at 2054.28,3077.98 h25 r180; PIN_NUMBER "18" at 2073.97,3077.98 h25 r180; PIN_NUMBER "46" at 1798.38,3077.98 h25 r180; PIN_NUMBER "9" at 2162.71,2759.86 h25 r180; PIN_NUMBER "7" at 2182.39,2759.86 h25 r180; PIN_NUMBER "8" at 2182.39,3077.98 h25 r180; PIN_NUMBER "6" at 2202.08,3077.98 h25 r180; PIN_NUMBER "59" at 1660.58,2759.86 h25 r180; PIN_NUMBER "4" at 2221.76,3077.98 h25 r180; PIN_NUMBER "2" at 2241.45,3077.98 h25 r180; PIN_NUMBER "49" at 1759.01,2759.86 h25 r180; PIN_NUMBER "12" at 2133.02,3077.98 h25 r180; PIN_NUMBER "10" at 2152.71,3077.98 h25 r180; PIN_NUMBER "56" at 1699.95,3077.98 h25 r180; PIN_NUMBER "54" at 1719.64,3077.98 h25 r180; PIN_NUMBER "61" at 1640.9,2759.86 h25 r180; PIN_NUMBER "52" at 1739.32,3077.98 h25 r180; PIN_NUMBER "55" at 1699.95,2759.86 h25 r180; PIN_NUMBER "16" at 2093.65,3077.98 h25 r180; PIN_NUMBER "79" at 1463.73,2759.86 h25 r180; PIN_NUMBER "74" at 1522.79,3077.98 h25 r180; PIN_NUMBER "80" at 1463.73,3077.98 h25 r180; PIN_NUMBER "77" at 1483.42,2759.86 h25 r180; PIN_NUMBER "78" at 1483.42,3077.98 h25 r180; PIN_NUMBER "47" at 1778.69,2759.86 h25 r180; PIN_NUMBER "14" at 2113.34,3077.98 h25 r180; PIN_NUMBER "17" at 2073.97,2759.86 h25 r180; PIN_NUMBER "15" at 2093.65,2759.86 h25 r180; PIN_NUMBER "42" at 1837.75,3077.98 h25 r180; PIN_NUMBER "32" at 1936.17,3077.98 h25 r180; PIN_NUMBER "35" at 1896.8,2759.86 h25 r180; PIN_NUMBER "43" at 1818.06,2759.86 h25 r180; PIN_NUMBER "44" at 1818.06,3077.98 h25 r180; PIN_NUMBER "33" at 1916.49,2759.86 h25 r180; PIN_NUMBER "45" at 1798.38,2759.86 h25 r180; PIN_NUMBER "41" at 1837.75,2759.86 h25 r180; PIN_NUMBER "37" at 1877.12,2759.86 h25 r180; PIN_NUMBER "36" at 1896.8,3077.98 h25 r180; PIN_NUMBER "34" at 1916.49,3077.98 h25 r180; PIN_NUMBER "40" at 1857.43,3077.98 h25 r180; PIN_NUMBER "57" at 1680.27,2759.86 h25 r180; PIN_NUMBER "25" at 1995.23,2759.86 h25 r180; PIN_NUMBER "24" at 2014.91,3077.98 h25 r180; PIN_NUMBER "27" at 1975.54,2759.86 h25 r180; PIN_NUMBER "26" at 1995.23,3077.98 h25 r180; PIN_NUMBER "29" at 1955.86,2759.86 h25 r180; PIN_NUMBER "28" at 1975.54,3077.98 h25 r180; PIN_NUMBER "30" at 1955.86,3077.98 h25 r180; PIN_NUMBER "53" at 1719.64,2759.86 h25 r180; PIN_NUMBER "22" at 2034.6,3077.98 h25 r180; PIN_NUMBER "70" at 1562.16,3077.98 h25 r180; PIN_NUMBER "72" at 1542.47,3077.98 h25 r180; PIN_NUMBER "67" at 1581.84,2759.86 h25 r180; PIN_NUMBER "51" at 1739.32,2759.86 h25 r180; PIN_NUMBER "31" at 1936.17,2759.86 h25 r180; PIN_NUMBER "23" at 2014.91,2759.86 h25 r180; PIN_NUMBER "50" at 1759.01,3077.98 h25 r180; PIN_NUMBER "68" at 1581.84,3077.98 h25 r180
CON13: PIN_NUMBER "29" at 1955.86,1137.81 h25 r180; PIN_NUMBER "42" at 1837.75,1455.93 h25 r180; PIN_NUMBER "36" at 1896.8,1455.93 h25 r180; PIN_NUMBER "35" at 1896.8,1137.81 h25 r180; PIN_NUMBER "31" at 1936.17,1137.81 h25 r180; PIN_NUMBER "40" at 1857.43,1455.93 h25 r180; PIN_NUMBER "33" at 1916.49,1137.81 h25 r180; PIN_NUMBER "27" at 1975.54,1137.81 h25 r180; PIN_NUMBER "37" at 1877.12,1137.81 h25 r180; PIN_NUMBER "38" at 1877.12,1455.93 h25 r180; PIN_NUMBER "2" at 2241.45,1455.93 h25 r180; PIN_NUMBER "1" at 2241.45,1137.81 h25 r180; PIN_NUMBER "24" at 2014.91,1455.93 h25 r180; PIN_NUMBER "22" at 2034.6,1455.93 h25 r180; PIN_NUMBER "16" at 2093.65,1455.93 h25 r180; PIN_NUMBER "30" at 1955.86,1455.93 h25 r180; PIN_NUMBER "52" at 1739.32,1455.93 h25 r180; PIN_NUMBER "46" at 1798.38,1455.93 h25 r180; PIN_NUMBER "72" at 1542.47,1455.93 h25 r180; PIN_NUMBER "48" at 1778.69,1455.93 h25 r180; PIN_NUMBER "43" at 1818.06,1137.81 h25 r180; PIN_NUMBER "44" at 1818.06,1455.93 h25 r180; PIN_NUMBER "64" at 1621.21,1455.93 h25 r180; PIN_NUMBER "62" at 1640.9,1455.93 h25 r180; PIN_NUMBER "56" at 1699.95,1455.93 h25 r180; PIN_NUMBER "60" at 1660.58,1455.93 h25 r180; PIN_NUMBER "58" at 1680.27,1455.93 h25 r180; PIN_NUMBER "47" at 1778.69,1137.81 h25 r180; PIN_NUMBER "61" at 1640.9,1137.81 h25 r180; PIN_NUMBER "59" at 1660.58,1137.81 h25 r180; PIN_NUMBER "57" at 1680.27,1137.81 h25 r180; PIN_NUMBER "28" at 1975.54,1455.93 h25 r180; PIN_NUMBER "55" at 1699.95,1137.81 h25 r180; PIN_NUMBER "26" at 1995.23,1455.93 h25 r180; PIN_NUMBER "68" at 1581.84,1455.93 h25 r180; PIN_NUMBER "73" at 1522.79,1137.81 h25 r180; PIN_NUMBER "11" at 2133.02,1137.81 h25 r180; PIN_NUMBER "10" at 2152.71,1455.93 h25 r180; PIN_NUMBER "9" at 2162.71,1137.81 h25 r180; PIN_NUMBER "13" at 2113.34,1137.81 h25 r180; PIN_NUMBER "15" at 2093.65,1137.81 h25 r180; PIN_NUMBER "17" at 2073.97,1137.81 h25 r180; PIN_NUMBER "18" at 2073.97,1455.93 h25 r180; PIN_NUMBER "14" at 2113.34,1455.93 h25 r180; PIN_NUMBER "12" at 2133.02,1455.93 h25 r180; PIN_NUMBER "8" at 2182.39,1455.93 h25 r180; PIN_NUMBER "7" at 2182.39,1137.81 h25 r180; PIN_NUMBER "80" at 1463.73,1455.93 h25 r180; PIN_NUMBER "3" at 2221.76,1137.81 h25 r180; PIN_NUMBER "4" at 2221.76,1455.93 h25 r180; PIN_NUMBER "25" at 1995.23,1137.81 h25 r180; PIN_NUMBER "23" at 2014.91,1137.81 h25 r180; PIN_NUMBER "78" at 1483.42,1455.93 h25 r180; PIN_NUMBER "76" at 1503.1,1455.93 h25 r180; PIN_NUMBER "66" at 1601.53,1455.93 h25 r180; PIN_NUMBER "20" at 2054.28,1455.93 h25 r180; PIN_NUMBER "77" at 1483.42,1137.81 h25 r180; PIN_NUMBER "79" at 1463.73,1137.81 h25 r180; PIN_NUMBER "75" at 1503.1,1137.81 h25 r180; PIN_NUMBER "63" at 1621.21,1137.81 h25 r180; PIN_NUMBER "53" at 1719.64,1137.81 h25 r180; PIN_NUMBER "32" at 1936.17,1455.93 h25 r180; PIN_NUMBER "34" at 1916.49,1455.93 h25 r180; PIN_NUMBER "19" at 2054.28,1137.81 h25 r180; PIN_NUMBER "6" at 2202.08,1455.93 h25 r180; PIN_NUMBER "49" at 1759.01,1137.81 h25 r180; PIN_NUMBER "50" at 1759.01,1455.93 h25 r180; PIN_NUMBER "41" at 1837.75,1137.81 h25 r180; PIN_NUMBER "5" at 2202.08,1137.81 h25 r180; PIN_NUMBER "67" at 1581.84,1137.81 h25 r180; PIN_NUMBER "21" at 2034.6,1137.81 h25 r180; PIN_NUMBER "39" at 1857.43,1137.81 h25 r180; PIN_NUMBER "70" at 1562.16,1455.93 h25 r180; PIN_NUMBER "54" at 1719.64,1455.93 h25 r180; PIN_NUMBER "71" at 1542.47,1137.81 h25 r180; PIN_NUMBER "51" at 1739.32,1137.81 h25 r180; PIN_NUMBER "74" at 1522.79,1455.93 h25 r180; PIN_NUMBER "69" at 1562.16,1137.81 h25 r180; PIN_NUMBER "65" at 1601.53,1137.81 h25 r180; PIN_NUMBER "45" at 1798.38,1137.81 h25 r180
D1: PIN_NUMBER "1" at 1185.76,4234.51 h25 r270; PIN_NUMBER "2" at 1185.76,4370.49 h25 r270
D2: PIN_NUMBER "1" at 1055.76,4234.51 h25 r270; PIN_NUMBER "2" at 1055.76,4370.49 h25 r270
H5: PIN_NUMBER "1" at 2883.52,1280.91 h20
H6: PIN_NUMBER "1" at 836.26,1280.91 h20
H7: PIN_NUMBER "1" at 836.26,2934.45 h20
H8: PIN_NUMBER "1" at 2883.62,2934.45 h20
H10: PIN_NUMBER "1" at 85.95,4535 h20
H12: PIN_NUMBER "1" at 3633.81,93.95 h20
H13: PIN_NUMBER "1" at 85.95,93.95 h20
H14: PIN_NUMBER "1" at 3633.81,4531.05 h20
L7: PIN_NUMBER "1" at 493.02,3731.55 h15.75; PIN_NUMBER "2" at 597.35,3731.55 h15.75
Q2: PIN_NUMBER "3" at 3366.26,3546.25 h25 r180; PIN_NUMBER "1" at 3328.26,3453.75 h25 r180; PIN_NUMBER "2" at 3403.26,3453.75 h25 r180
Q3: PIN_NUMBER "1" at 3483.26,3453.75 h25 r180; PIN_NUMBER "3" at 3521.26,3546.25 h25 r180; PIN_NUMBER "2" at 3558.26,3453.75 h25 r180
Q7: PIN_NUMBER "1" at 369.19,4382.5 h25 r90; PIN_NUMBER "3" at 461.69,4344.5 h25 r90; PIN_NUMBER "2" at 369.19,4307.5 h25 r90
Q8: PIN_NUMBER "3" at 701.69,4344.5 h25 r90; PIN_NUMBER "1" at 609.19,4382.5 h25 r90; PIN_NUMBER "2" at 609.19,4307.5 h25 r90
SW1: PIN_NUMBER "2" at 949.5,4433.82 h23.62 r90; PIN_NUMBER "1" at 949.5,4217.28 h23.62 r90; PIN_NUMBER "3" at 792.02,4433.82 h23.62 r90; PIN_NUMBER "4" at 792.02,4217.28 h23.62 r90
U2: PIN_NUMBER "6" at 3066.63,3405.16 h15.75 r270; PIN_NUMBER "4" at 2946.55,3385.47 h15.75 r270; PIN_NUMBER "2" at 2946.55,3424.84 h15.75 r270; PIN_NUMBER "7" at 3066.63,3424.84 h15.75 r270; PIN_NUMBER "5" at 3066.63,3385.47 h15.75 r270; PIN_NUMBER "3" at 2946.55,3405.16 h15.75 r270; PIN_NUMBER "8" at 3066.63,3444.53 h15.75 r270; PIN_NUMBER "1" at 2946.55,3444.53 h15.75 r270
U8: PIN_NUMBER "12" at 1312.16,368.84 h15.75 r90; PIN_NUMBER "2" at 1121.61,368.84 h15.75 r90; PIN_NUMBER "13" at 1337.75,410.18 h15.75 r180; PIN_NUMBER "5" at 1180.66,368.84 h15.75 r90; PIN_NUMBER "31" at 1194.05,652.3 h15.75 r90; PIN_NUMBER "4" at 1160.98,368.84 h15.75 r90; PIN_NUMBER "28" at 1253.1,652.3 h15.75 r90; PIN_NUMBER "47" at 1054.28,429.86 h15.75 r180; PIN_NUMBER "20" at 1337.75,547.97 h15.75 r180; PIN_NUMBER "30" at 1213.73,652.3 h15.75 r90; PIN_NUMBER "9" at 1259.4,368.84 h15.75 r90; PIN_NUMBER "21" at 1337.75,567.66 h15.75 r180; PIN_NUMBER "39" at 1054.28,587.34 h15.75 r180; PIN_NUMBER "8" at 1239.72,368.84 h15.75 r90; PIN_NUMBER "29" at 1233.42,652.3 h15.75 r90; PIN_NUMBER "34" at 1134.99,652.3 h15.75 r90; PIN_NUMBER "10" at 1272.79,368.84 h15.75 r90; PIN_NUMBER "3" at 1141.29,368.84 h15.75 r90; PIN_NUMBER "44" at 1054.28,488.92 h15.75 r180; PIN_NUMBER "22" at 1337.75,587.34 h15.75 r180; PIN_NUMBER "32" at 1174.36,652.3 h15.75 r90; PIN_NUMBER "46" at 1054.28,449.55 h15.75 r180; PIN_NUMBER "45" at 1054.28,469.23 h15.75 r180; PIN_NUMBER "42" at 1054.28,528.29 h15.75 r180; PIN_NUMBER "37" at 1054.28,626.71 h15.75 r180; PIN_NUMBER "24" at 1337.75,626.71 h15.75 r180; PIN_NUMBER "40" at 1054.28,567.66 h15.75 r180; PIN_NUMBER "41" at 1054.28,547.97 h15.75 r180; PIN_NUMBER "7" at 1220.03,368.84 h15.75 r90; PIN_NUMBER "6" at 1200.35,368.84 h15.75 r90; PIN_NUMBER "16" at 1337.75,469.23 h15.75 r180; PIN_NUMBER "43" at 1054.28,508.6 h15.75 r180; PIN_NUMBER "38" at 1054.28,607.03 h15.75 r180; PIN_NUMBER "48" at 1054.28,410.18 h15.75 r180; PIN_NUMBER "49" at 1188.61,510.57 h25 r90; PIN_NUMBER "1" at 1101.92,368.84 h15.75 r90; PIN_NUMBER "36" at 1095.62,652.3 h15.75 r90; PIN_NUMBER "35" at 1115.31,652.3 h15.75 r90; PIN_NUMBER "33" at 1154.68,652.3 h15.75 r90; PIN_NUMBER "27" at 1272.79,652.3 h15.75 r90; PIN_NUMBER "11" at 1292.47,368.84 h15.75 r90; PIN_NUMBER "25" at 1312.16,652.3 h15.75 r90; PIN_NUMBER "26" at 1292.47,652.3 h15.75 r90; PIN_NUMBER "17" at 1337.75,488.92 h15.75 r180; PIN_NUMBER "14" at 1337.75,429.86 h15.75 r180; PIN_NUMBER "15" at 1337.75,449.55 h15.75 r180; PIN_NUMBER "19" at 1337.75,528.29 h15.75 r180; PIN_NUMBER "18" at 1337.75,508.6 h15.75 r180; PIN_NUMBER "23" at 1337.75,607.03 h15.75 r180
U9: PIN_NUMBER "44" at 1801.26,3650.01 h25 r180; PIN_NUMBER "3" at 1850.63,3945.28 h25 r180; PIN_NUMBER "20" at 1505.97,3945.28 h25 r180; PIN_NUMBER "14" at 1624.08,3945.28 h25 r180; PIN_NUMBER "35" at 1624.08,3650.01 h25 r180; PIN_NUMBER "16" at 1584.71,3945.28 h25 r180; PIN_NUMBER "12" at 1663.45,3945.28 h25 r180; PIN_NUMBER "6" at 1791.56,3945.28 h25 r180; PIN_NUMBER "8" at 1752.19,3945.28 h25 r180; PIN_NUMBER "13" at 1643.77,3945.28 h25 r180; PIN_NUMBER "19" at 1525.66,3945.28 h25 r180; PIN_NUMBER "30" at 1525.66,3650.01 h25 r180; PIN_NUMBER "22" at 1466.6,3945.28 h25 r180; PIN_NUMBER "26" at 1446.92,3650.01 h25 r180; PIN_NUMBER "23" at 1446.92,3945.28 h25 r180; PIN_NUMBER "27" at 1466.6,3650.01 h25 r180; PIN_NUMBER "7" at 1771.89,3945.28 h25 r180; PIN_NUMBER "18" at 1545.34,3945.28 h25 r180; PIN_NUMBER "17" at 1565.03,3945.28 h25 r180; PIN_NUMBER "9" at 1732.52,3945.28 h25 r180; PIN_NUMBER "11" at 1683.14,3945.28 h25 r180; PIN_NUMBER "5" at 1811.26,3945.28 h25 r180; PIN_NUMBER "29" at 1505.97,3650.01 h25 r180; PIN_NUMBER "1" at 1890,3945.28 h25 r180; PIN_NUMBER "31" at 1545.34,3650.01 h25 r180; PIN_NUMBER "42" at 1761.89,3650.01 h25 r180; PIN_NUMBER "33" at 1584.71,3650.01 h25 r180; PIN_NUMBER "32" at 1565.03,3650.01 h25 r180; PIN_NUMBER "40" at 1722.52,3650.01 h25 r180; PIN_NUMBER "41" at 1742.19,3650.01 h25 r180; PIN_NUMBER "36" at 1643.77,3650.01 h25 r180; PIN_NUMBER "43" at 1781.56,3650.01 h25 r180; PIN_NUMBER "38" at 1683.14,3650.01 h25 r180; PIN_NUMBER "46" at 1840.63,3650.01 h25 r180; PIN_NUMBER "2" at 1870.3,3945.28 h25 r180; PIN_NUMBER "15" at 1604.4,3945.28 h25 r180; PIN_NUMBER "4" at 1830.93,3945.28 h25 r180; PIN_NUMBER "10" at 1702.82,3945.28 h25 r180; PIN_NUMBER "21" at 1486.29,3945.28 h25 r180; PIN_NUMBER "34" at 1604.4,3650.01 h25 r180; PIN_NUMBER "28" at 1486.29,3650.01 h25 r180; PIN_NUMBER "45" at 1820.93,3650.01 h25 r180; PIN_NUMBER "39" at 1702.82,3650.01 h25 r180; PIN_NUMBER "48" at 1880,3650.01 h25 r180; PIN_NUMBER "24" at 1427.23,3945.28 h25 r180; PIN_NUMBER "25" at 1427.23,3650.01 h25 r180; PIN_NUMBER "37" at 1663.45,3650.01 h25 r180; PIN_NUMBER "47" at 1860.3,3650.01 h25 r180
U12: PIN_NUMBER "34" at 2508.34,3942.64 h15.75; PIN_NUMBER "9" at 2239.05,3637.52 h15.75; PIN_NUMBER "44" at 2311.49,3942.64 h15.75; PIN_NUMBER "1" at 2081.57,3637.52 h15.75; PIN_NUMBER "26" at 2567.39,3637.52 h15.75; PIN_NUMBER "31" at 2567.39,3942.64 h15.75; PIN_NUMBER "30" at 2587.08,3942.64 h15.75; PIN_NUMBER "28" at 2606.76,3637.52 h15.75; PIN_NUMBER "27" at 2587.08,3637.52 h15.75; PIN_NUMBER "32" at 2547.71,3942.64 h15.75; PIN_NUMBER "10" at 2252.43,3637.52 h15.75; PIN_NUMBER "5" at 2160.31,3637.52 h15.75; PIN_NUMBER "2" at 2101.25,3637.52 h15.75; PIN_NUMBER "16" at 2370.54,3637.52 h15.75; PIN_NUMBER "13" at 2311.49,3637.52 h15.75; PIN_NUMBER "18" at 2409.91,3637.52 h15.75; PIN_NUMBER "21" at 2468.97,3637.52 h15.75; PIN_NUMBER "25" at 2547.71,3637.52 h15.75; PIN_NUMBER "36" at 2468.97,3942.64 h15.75; PIN_NUMBER "43" at 2331.17,3942.64 h15.75; PIN_NUMBER "35" at 2488.65,3942.64 h15.75; PIN_NUMBER "33" at 2528.02,3942.64 h15.75; PIN_NUMBER "53" at 2134.32,3942.64 h15.75; PIN_NUMBER "49" at 2213.06,3942.64 h15.75; PIN_NUMBER "50" at 2193.38,3942.64 h15.75; PIN_NUMBER "29" at 2606.76,3942.64 h15.75; PIN_NUMBER "8" at 2219.36,3637.52 h15.75; PIN_NUMBER "55" at 2094.95,3942.64 h15.75; PIN_NUMBER "6" at 2179.99,3637.52 h15.75; PIN_NUMBER "7" at 2199.68,3637.52 h15.75; PIN_NUMBER "54" at 2114.64,3942.64 h15.75; PIN_NUMBER "3" at 2120.94,3637.52 h15.75; PIN_NUMBER "4" at 2140.62,3637.52 h15.75; PIN_NUMBER "56" at 2075.27,3942.64 h15.75; PIN_NUMBER "51" at 2173.69,3942.64 h15.75; PIN_NUMBER "12" at 2291.8,3637.52 h15.75; PIN_NUMBER "14" at 2331.17,3637.52 h15.75; PIN_NUMBER "11" at 2272.12,3637.52 h15.75; PIN_NUMBER "52" at 2154.01,3942.64 h15.75; PIN_NUMBER "15" at 2350.86,3637.52 h15.75; PIN_NUMBER "19" at 2429.6,3637.52 h15.75; PIN_NUMBER "20" at 2449.28,3637.52 h15.75; PIN_NUMBER "22" at 2488.65,3637.52 h15.75; PIN_NUMBER "23" at 2508.34,3637.52 h15.75; PIN_NUMBER "24" at 2528.02,3637.52 h15.75; PIN_NUMBER "42" at 2350.86,3942.64 h15.75; PIN_NUMBER "46" at 2272.12,3942.64 h15.75; PIN_NUMBER "39" at 2409.91,3942.64 h15.75; PIN_NUMBER "40" at 2390.23,3942.64 h15.75; PIN_NUMBER "47" at 2252.43,3942.64 h15.75; PIN_NUMBER "41" at 2370.54,3942.64 h15.75; PIN_NUMBER "45" at 2291.8,3942.64 h15.75; PIN_NUMBER "17" at 2390.23,3637.52 h15.75; PIN_NUMBER "48" at 2232.75,3942.64 h15.75; PIN_NUMBER "37" at 2449.28,3942.64 h15.75; PIN_NUMBER "38" at 2429.6,3942.64 h15.75
U17: PIN_NUMBER "1" at 2946.55,3594.53 h15.75 r270; PIN_NUMBER "8" at 3066.63,3594.53 h15.75 r270; PIN_NUMBER "3" at 2946.55,3555.16 h15.75 r270; PIN_NUMBER "5" at 3066.63,3535.47 h15.75 r270; PIN_NUMBER "7" at 3066.63,3574.84 h15.75 r270; PIN_NUMBER "2" at 2946.55,3574.84 h15.75 r270; PIN_NUMBER "4" at 2946.55,3535.47 h15.75 r270; PIN_NUMBER "6" at 3066.63,3555.16 h15.75 r270
U22: PIN_NUMBER "7" at 511.25,3992.35 h25 r270; PIN_NUMBER "1" at 309.13,4042.35 h25 r270; PIN_NUMBER "5" at 511.25,3892.35 h25 r270; PIN_NUMBER "2" at 309.13,3992.35 h25 r270; PIN_NUMBER "6" at 511.25,3942.35 h25 r270; PIN_NUMBER "4" at 309.13,3892.35 h25 r270; PIN_NUMBER "3" at 309.13,3942.35 h25 r270; PIN_NUMBER "9" at 410.19,3967.27 h25.2 r270; PIN_NUMBER "8" at 511.25,4042.35 h25 r270
Y1: PIN_NUMBER "1" at 796,220.19 h15.75 r180; PIN_NUMBER "3" at 722.93,335.55 h15.75 r180; PIN_NUMBER "4" at 722.93,220.19 h15.75 r180; PIN_NUMBER "2" at 796,335.55 h15.75 r180
Y2: DRAWING_ORIGIN "2" at 2975.76,410.63 h25 r270; DRAWING_ORIGIN "1" at 2975.76,610.63 h25 r270